# Altium PCB two_layer.pcbdoc
Units mm, origin at the board's own origin, x right, y up, seen from the top; angles counter-clockwise.
Board outline 112.01 x 152.27 mm, 2 copper layers (Top Layer, Bottom Layer); 15 components, 36 nets, 72 pads, 10 vias.
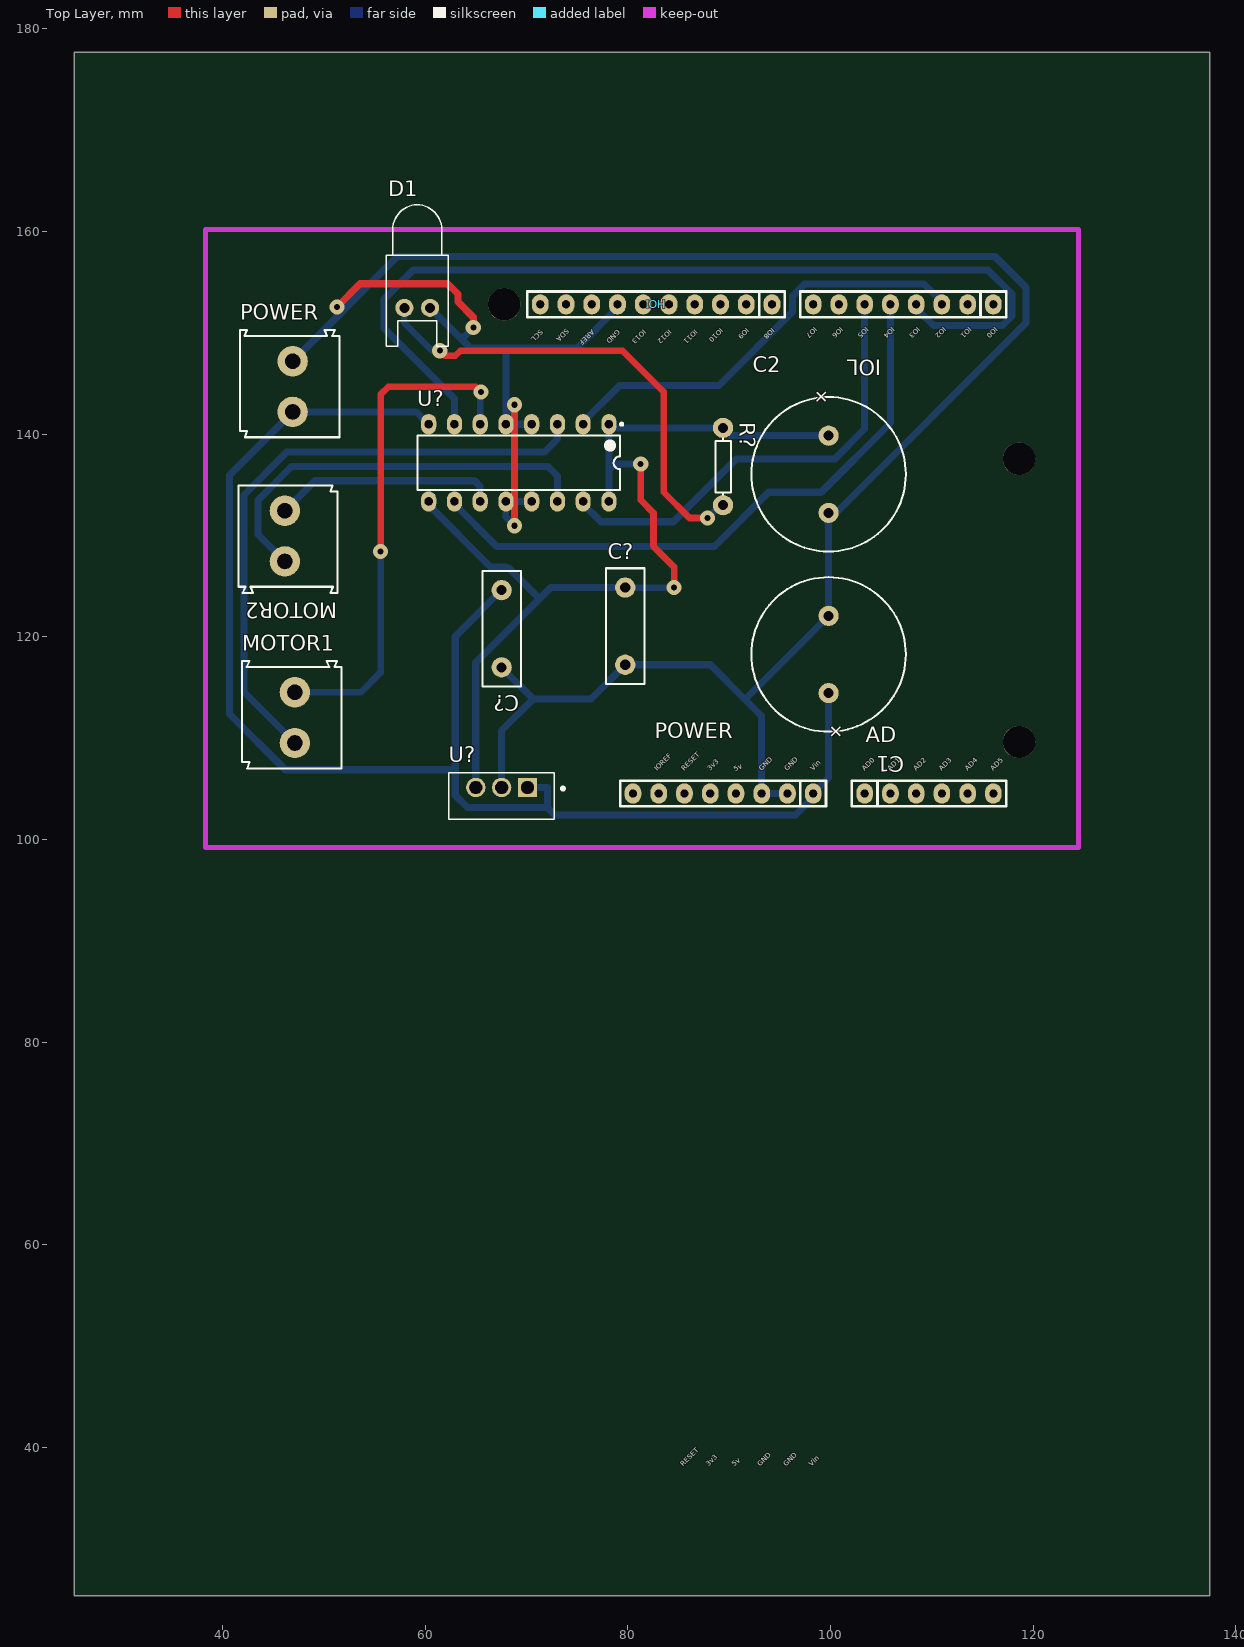
[diagram p0: Top Layer view]
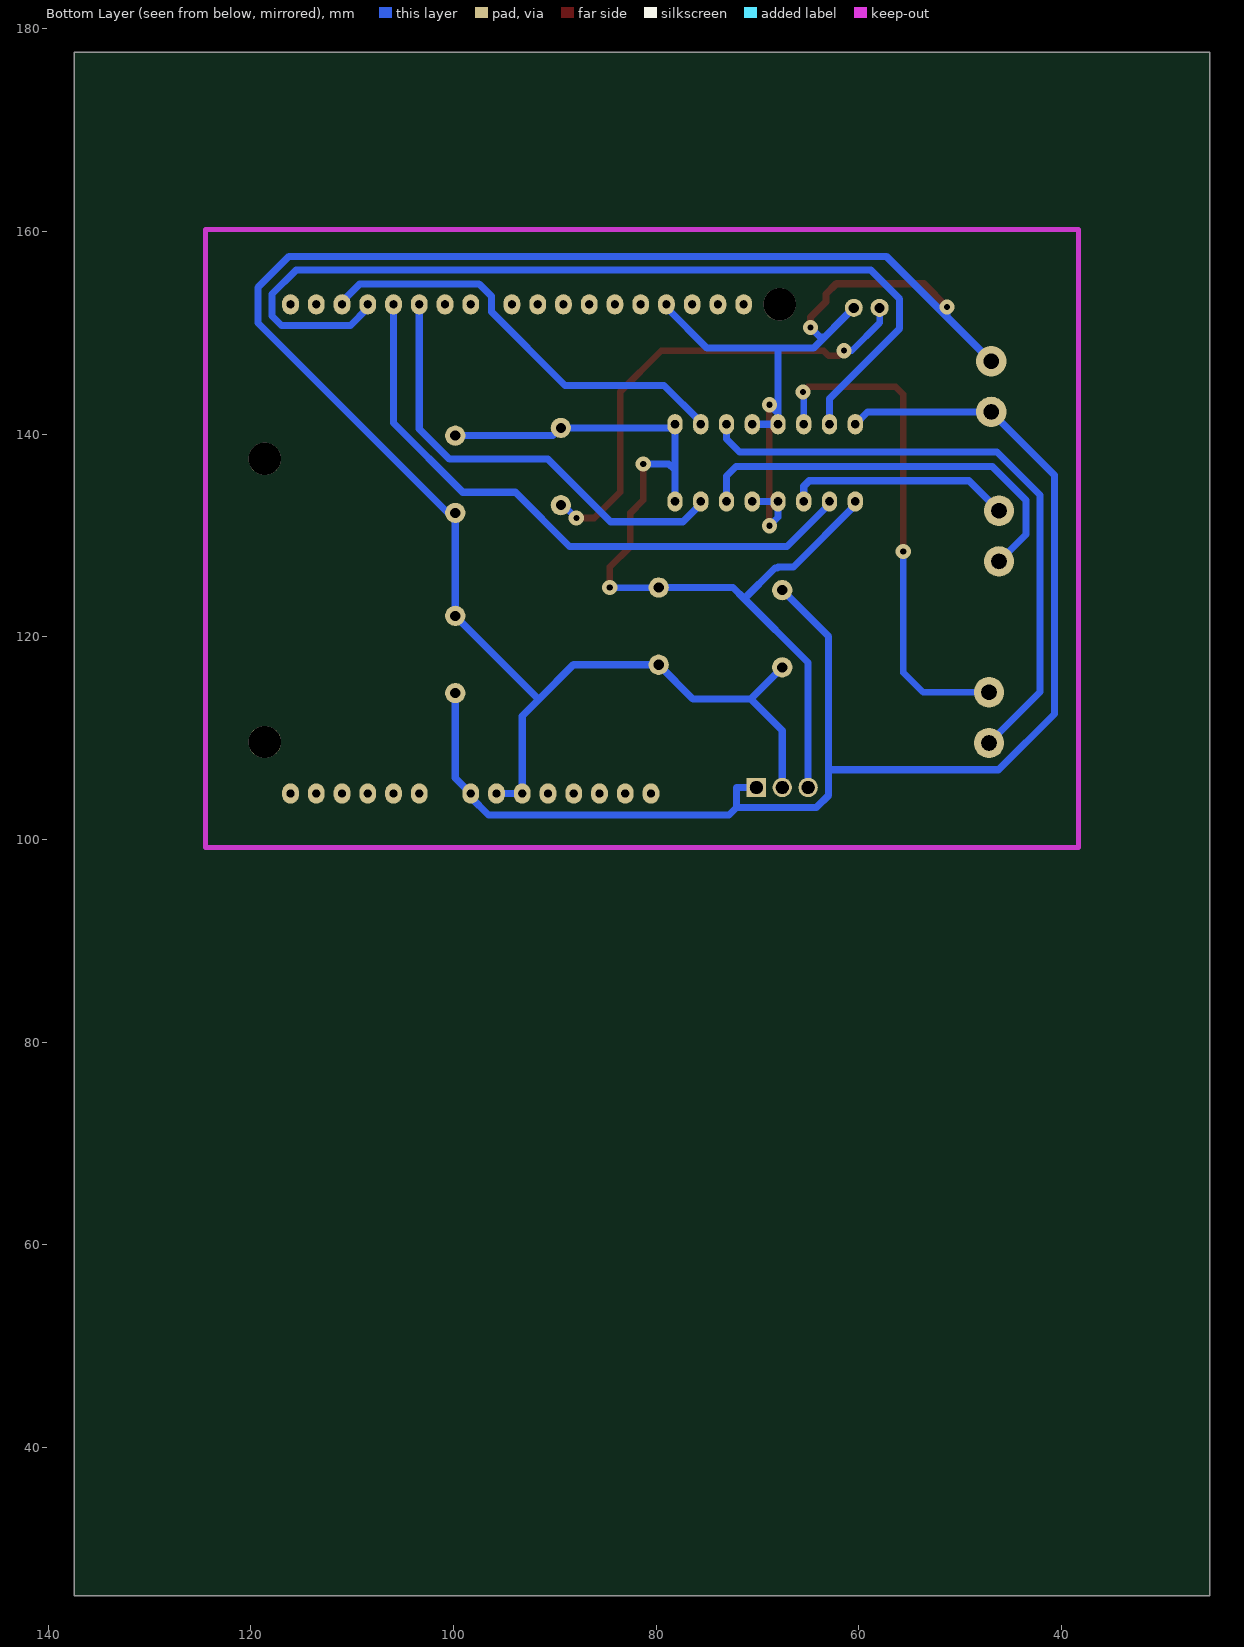
[diagram p1: Bottom Layer view, seen from below]

## Layer stack, top to bottom
Top Layer: signal copper (thickness not stored)
Dielectric: dielectric 0.32, FR-4, Dk 4.8
Bottom Layer: signal copper (thickness not stored)

## Board outline
137.406,25.4 25.4,25.4 25.4,177.668 137.406,177.668

## Components (designator, comment, footprint, x,y, rotation, side; value= is the part's Value field where it differs from the comment)
AD "AD" "HEADER 6X1 8.5MM" 103.374,104.542 r0 top
C1 "RB7.6-15" RB7.6-15 99.818,118.258 r270 top
C2 "RB7.6-15" RB7.6-15 99.818,136.038 r90 top
C? "Cap" RAD-0.3 67.56,120.798 r270 top
C? "Cap" RAD-0.3 79.752,121.052 r270 top
D1 "Red led" LED-0 59.231,152.459 r180 top
IOH "IOH" "HEADER 10X1 8.5MM" 94.23,152.802 r180 top
IOL "IOL" "HEADER 8X1 8.5MM" 116.074,152.802 r180 top
MOTOR1 "691216710002" 691216710002 46.864,112.028 r90 top
MOTOR2 "691216710002" 691216710002 46.478,129.942 r270 top
POWER "691216710002" 691216710002 46.644,144.69 r90 top
POWER "POWER_UNO" "HEADER 8X1 8.5MM" 98.294,104.542 r180 top
R? "Res1" AXIAL-0.3 89.404,136.8 r270 top
U? "L293D" STM-L293D-16 69.252,137.167 r270 top
U? "L7805CV-DG" TO255P1040X460X2890-3 67.56,104.288 r180 top

## Footprints (in the part's own frame and the unit in brackets; to place one, negate y for a bottom-side part, rotate by r counter-clockwise, add the part's x,y. Pads: shape width x height; smd on the part's side, far side on the other; paste and mask are expansions set on the pad)
691216710002 [mm]
  round 3 hole 1.5 slot 1.505 at 0 deg paste+0 mask+0.051: 1(-2.5,-0.3) 2(2.5,-0.3)
  silkscreen extent -5,-4.9 5.6,4.9
AXIAL-0.3 [mm]
  round 2 hole 1 paste+0 mask+0.051: 1(-3.81,0) 2(3.81,0)
  silkscreen extent -2.77,-0.76 2.77,0.76
"HEADER 6X1 8.5MM" [mm]
  oval 1.65x2 hole 0.762 slot 0.767 at 90 deg paste+0 mask+0.051: 1(0,0) 2(2.54,0) 3(5.08,0) 4(7.62,0) 5(10.16,0) 6(12.7,0)
  silkscreen extent -1.27,-1.27 13.97,1.27
"HEADER 8X1 8.5MM" [mm]
  oval 1.65x2 hole 0.762 slot 0.767 at 90 deg paste+0 mask+0.051: 1(0,0) 2(2.54,0) 3(5.08,0) 4(7.62,0) 5(10.16,0) 6(12.7,0) 7(15.24,0) 8(17.78,0)
  silkscreen extent -1.27,-1.27 19.05,1.27
"HEADER 10X1 8.5MM" [mm]
  oval 1.65x2 hole 0.762 slot 0.767 at 90 deg paste+0 mask+0.051: 1(0,0) 2(2.54,0) 3(5.08,0) 4(7.62,0) 5(10.16,0) 6(12.7,0) 7(15.24,0) 8(17.78,0) 9(20.32,0) 10(22.86,0)
  silkscreen extent -1.27,-1.27 24.13,1.27
LED-0 [mil]
  round 70 hole 39.37 paste+0 mask+2: 1(50,0) 2(-50,0)
  silkscreen extent -120,-400 120,150
RAD-0.3 [mm]
  round 2 hole 1 paste+0 mask+0.051: 1(-3.81,0) 2(3.81,0)
  silkscreen extent -5.71,-1.91 5.72,1.9
RB7.6-15 [mm]
  round 2 hole 1 paste+0 mask+0.051: 1(3.81,0) 2(-3.81,0)
  silkscreen extent -7.62,-7.62 7.62,7.62
STM-L293D-16 [mm]
  oval 2x1.5 hole 0.8 slot 0.805 at 0 deg paste+0 mask+0.051: 1(-3.81,8.89) 2(-3.81,6.35) 3(-3.81,3.81) 4(-3.81,1.27) 5(-3.81,-1.27) 6(-3.81,-3.81) 7(-3.81,-6.35) 8(-3.81,-8.89) 9(3.81,-8.89) 10(3.81,-6.35) 11(3.81,-3.81) 12(3.81,-1.27) 13(3.81,1.27) 14(3.81,3.81) 15(3.81,6.35) 16(3.81,8.89)
  silkscreen extent -3.93,-10 2.7,10.27
TO255P1040X460X2890-3 [mm]
  rect 1.91x1.91 hole 1.27 slot 1.275 at 0 deg paste+0 mask+0.051: 1(-2.55,-0.85)
  round 1.91 hole 1.27 slot 1.275 at 0 deg paste+0 mask+0.051: 2(0,-0.85) 3(2.55,-0.85)
  silkscreen extent -6.19,-2.3 5.2,2.3

## Free pads (board coordinates)
  round 3.2 hole 3.2 paste+0 mask+0.051: 0(67.814,152.802) 0(118.614,109.622) 0(118.614,137.562)

## Via types
v1: diameter 1.5, hole 0.6, Top Layer to Bottom Layer, tented both sides, 10 vias

## Nets (pads, with @x,y where several pads share a name; then routed paths per layer and width w, separated by ;. In a path a pad name is that pad's centre, name@x,y a point inside that pad or via, vN(x,y) a via of type N, cw(c..) or ccw(c..) an arc to the next point about the centre after c; other vN are vias at no path point)
3V3: POWER.5
5V: POWER.4
AD0: AD.1
AD1: AD.2
AD2: AD.3
AD3: AD.4
AD4: AD.5
AD5: AD.6
AREF: IOH.8
GND: C1.2 C2.2 C?.2 D1.2 IOH.7 POWER.2 POWER.3 U?.2@67.56,105.137 U?.4 U?.5 U?.12 U?.13 | length 252.6
  Top Layer w0.65: v1(68.83,130.958) v1(68.83,142.896)
  Top Layer w0.7: v1(51.304,152.548) 53.59,154.834 62.226,154.834 63.242,153.818 63.242,153.056 64.766,151.532 v1(64.766,150.516)
  Bottom Layer w0.65: U?.12 67.982,131.806 v1(68.83,130.958) ; U?.5 67.982,142.047 v1(68.83,142.896)
  Bottom Layer w0.7: POWER.2@46.944,147.19 57.295,157.542 116.212,157.542 119.273,154.481 119.273,150.951 100.549,132.228 C2.2 C1.2 91.583,113.833 ; 51.304,151.687 v1(51.304,152.548) ; D1.2 64.484,148.476 67.982,148.476 ; 63.377,149.583 63.833,149.583 v1(64.766,150.516) ; U?.2@67.56,105.137 67.56,110.758 70.675,113.873 ; C?.2@67.56,116.987 70.675,113.873 ; U?.12 U?.13 ; U?.4 U?.5 67.982,148.476 ; IOH.7 78.99,152.476 74.99,148.476 67.982,148.476 ; POWER.2@95.754,104.541 POWER.3 93.214,112.202 91.583,113.833 ; 70.675,113.873 76.383,113.873 79.752,117.241 88.174,117.241 91.583,113.833
IO0: IOL.1
IO1: IOL.2
IO2: IOL.3 U?.2@75.602,140.977 | length 43.1
  Bottom Layer w0.7: U?.2@75.602,140.977 75.602,141.187 79.215,144.8 88.991,144.8 96.263,152.072 96.263,153.605 97.46,154.803 109.243,154.803 110.994,153.052 IOL.3
IO3: IOL.4 U?.7 | length 92.4
  Bottom Layer w0.7: U?.7 62.902,143.49 55.976,150.416 55.976,153.328 58.82,156.173 115.548,156.173 117.907,153.814 117.907,151.659 116.974,150.727 110.153,150.727 108.454,152.426 IOL.4
IO4: IOL.5 U?.10 | length 61.7
  Bottom Layer w0.7: U?.10 62.902,133.109 67.086,128.926 88.556,128.926 93.894,134.264 99.087,134.264 105.914,141.091 IOL.5
IO5: IOL.6 U?.15 | length 44.8
  Bottom Layer w0.7: U?.15 75.602,133.107 77.353,131.355 84.505,131.355 90.675,137.526 100.398,137.526 103.374,140.502 IOL.6
IO6: IOL.7
IO7: IOL.8
IO8: IOH.1
IO9: IOH.2
IO10: IOH.3
IO11: IOH.4
IO12: IOH.5
IO13: IOH.6
IOREF: POWER.7
NETC2_1: C2.1 C?.1@79.752,124.862 R?.1 U?.1@78.142,140.977 U?.3@65.01,105.137 U?.9 U?.16 | length 96.6
  Top Layer w0.65: v1(81.276,137.054) 81.276,133.498 82.546,132.228 82.546,128.926 84.578,126.894 v1(84.578,124.862)
  Bottom Layer w0.65: 78.142,136.426 78.77,137.054 v1(81.276,137.054) ; C?.1@79.752,124.862 v1(84.578,124.862)
  Bottom Layer w0.7: U?.9 60.362,132.995 66.458,126.899 67.966,126.899 68.058,126.806 68.261,126.806 71.306,123.761 ; U?.3@65.01,105.137 65.01,117.465 71.306,123.761 ; U?.16 78.142,138.22 78.142,140.242 U?.1@78.509,140.61 ; U?.1@78.142,140.977 U?.1@78.509,140.61 ; C?.1@79.752,124.861 72.407,124.861 71.306,123.761 ; C2.1 90.166,139.848 R?.1 U?.1@78.509,140.61
NETD1_1: D1.1 R?.2 | length 47.7
  Top Layer w0.65: v1(61.464,148.23) 61.972,147.722 62.988,147.722 63.496,148.23 79.498,148.23 83.562,144.166 83.562,134.26 86.102,131.72 v1(87.88,131.72)
  Bottom Layer w0.65: D1.1 57.961,150.97 60.702,148.23 v1(61.464,148.23) ; v1(87.88,131.72) 89.15,132.99 R?.2
NETMOTOR1_1: MOTOR1.1 U?.3@73.062,140.977 | length 61.2
  Bottom Layer w0.7: MOTOR1.1 42.143,114.549 42.143,134.005 46.359,138.221 71.775,138.221 73.062,139.507 U?.3@73.062,140.977
NETMOTOR1_2: MOTOR1.2 U?.6 | length 50.4
  Top Layer w0.65: v1(55.622,128.418) 55.622,143.912 56.384,144.674 65.02,144.674 v1(65.528,144.166)
  Bottom Layer w0.65: MOTOR1.2 53.671,114.528 55.622,116.48 v1(55.622,128.418) ; U?.6 65.442,144.079 v1(65.528,144.166)
NETMOTOR2_1: MOTOR2.1 U?.11 | length 22.2
  Bottom Layer w0.7: MOTOR2.1 49.131,135.395 64.901,135.395 65.442,134.854 U?.11
NETMOTOR2_2: MOTOR2.2 U?.14 | length 40.9
  Bottom Layer w0.7: MOTOR2.2 43.528,130.092 43.528,133.476 46.842,136.791 72.14,136.791 73.062,135.87 U?.14
RESET: POWER.6
S$4670: 
SCL: IOH.10
SDA: IOH.9
VIN: C1.1 C?.1@67.56,124.608 POWER.1 U?.1@70.11,105.137 U?.8 | length 144.7
  Bottom Layer w0.7: U?.8 59.148,142.19 46.944,142.19 40.697,135.943 40.697,112.401 46.216,106.882 62.98,106.882 ; C?.1@67.56,124.607 62.98,120.028 62.98,106.882 ; U?.1@70.11,105.137 72.065,105.137 72.065,103.148 ; C1.1 99.818,106.065 98.294,104.541 98.294,104.167 96.539,102.412 72.801,102.412 72.065,103.148 ; 62.98,106.882 62.98,104.374 64.206,103.148 72.065,103.148
pads on no net: POWER.8

## Silkscreen, mask and mechanical layers (free items; w line width, h text height)
Top Overlay:
  text "IO7" at 98.421,150.59 h0.51 r225
  text "IO6" at 100.961,150.59 h0.51 r225
  text "IO5" at 103.501,150.59 h0.51 r225
  text "IO4" at 106.041,150.59 h0.51 r225
  text "IO3" at 108.581,150.59 h0.51 r225
  text "IO2" at 111.121,150.59 h0.51 r225
  text "IO1" at 113.661,150.59 h0.51 r225
  text "IO0" at 116.201,150.59 h0.51 r225
  text "IO10" at 89.15,150.516 h0.51 r225
  text "IO9" at 91.69,150.516 h0.51 r225
  text "IO8" at 94.23,150.516 h0.51 r225
  text "SDA" at 73.91,150.463 h0.51 r225
  text "SCL" at 71.37,150.336 h0.51 r225
  text "AREF" at 76.45,150.336 h0.51 r225
  text "GND" at 78.99,150.336 h0.51 r225
  text "IO13" at 81.53,150.336 h0.51 r225
  text "IO12" at 84.07,150.336 h0.51 r225
  text "IO11" at 86.61,150.336 h0.51 r225
  text "IOREF" at 82.927,106.753 h0.51 r45
  text "RESET" at 85.594,106.753 h0.51 r45
  text "3v3" at 88.134,106.753 h0.51 r45
  text "GND" at 93.214,106.753 h0.51 r45
  text "GND" at 95.754,106.753 h0.51 r45
  text "Vin" at 98.294,106.753 h0.51 r45
  text "AD0" at 103.374,106.753 h0.51 r45
  text "AD1" at 105.914,106.753 h0.51 r45
  text "AD2" at 108.454,106.753 h0.51 r45
  text "AD3" at 110.994,106.753 h0.51 r45
  text "AD4" at 113.534,106.753 h0.51 r45
  text "AD5" at 116.074,106.753 h0.51 r45
  text "5v" at 90.606,106.704 h0.51 r26
  text "RESET" at 85.467,38.121 h0.51 r45
  text "3v3" at 88.007,38.121 h0.51 r45
  text "GND" at 93.087,38.121 h0.51 r45
  text "GND" at 95.627,38.121 h0.51 r45
  text "Vin" at 98.167,38.121 h0.51 r45
  text "5v" at 90.524,38.1 h0.51 r38
Mechanical 1:
  lines w0.127: 52.574,102.002 118.614,102.002 118.614,103.272 121.154,105.812 121.154,140.102 118.614,142.642 118.614,152.802 116.074,155.342 52.574,155.342 ; 68.144,104.538 cw(c66.544,104.542) 68.144,104.542 ; 69.414,152.798 cw(c67.814,152.802) 69.414,152.802 ; 120.214,109.618 cw(c118.614,109.622) 120.214,109.622 ; 120.214,137.558 cw(c118.614,137.562) 120.214,137.562
Document:
  lines w0.003: 81.403,101.534 81.403,101.534

## Text inside footprints (layer, text, board x,y; h text height)
C1: Top Overlay "+" at 100.362,109.595 h1.5 r45
C2: Top Overlay "+" at 99.274,144.7 h1.5 r225